# EAGLE board stm32 (EAGLE 7.7.0)
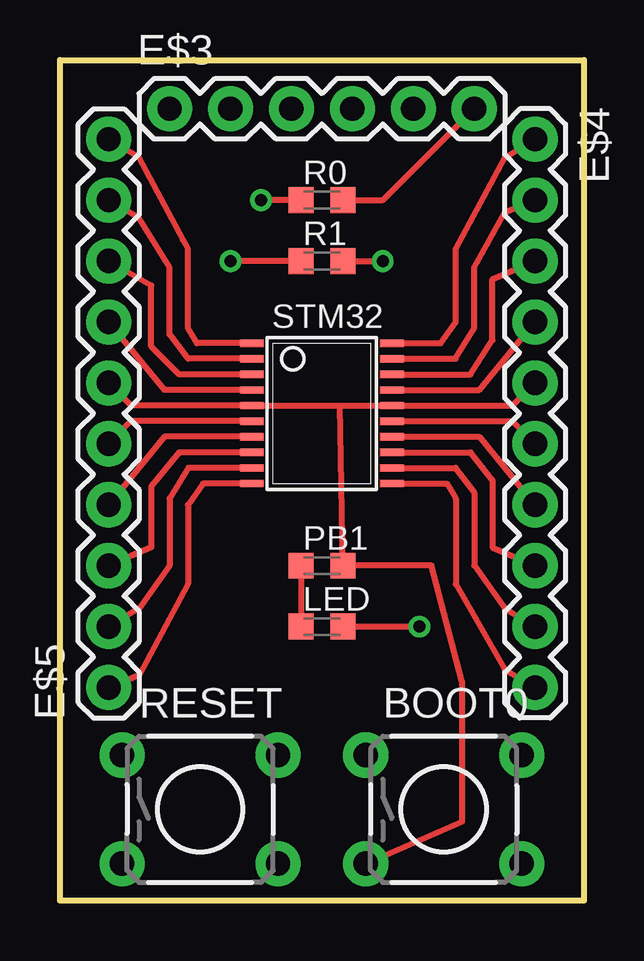
[diagram p0: board, top side]
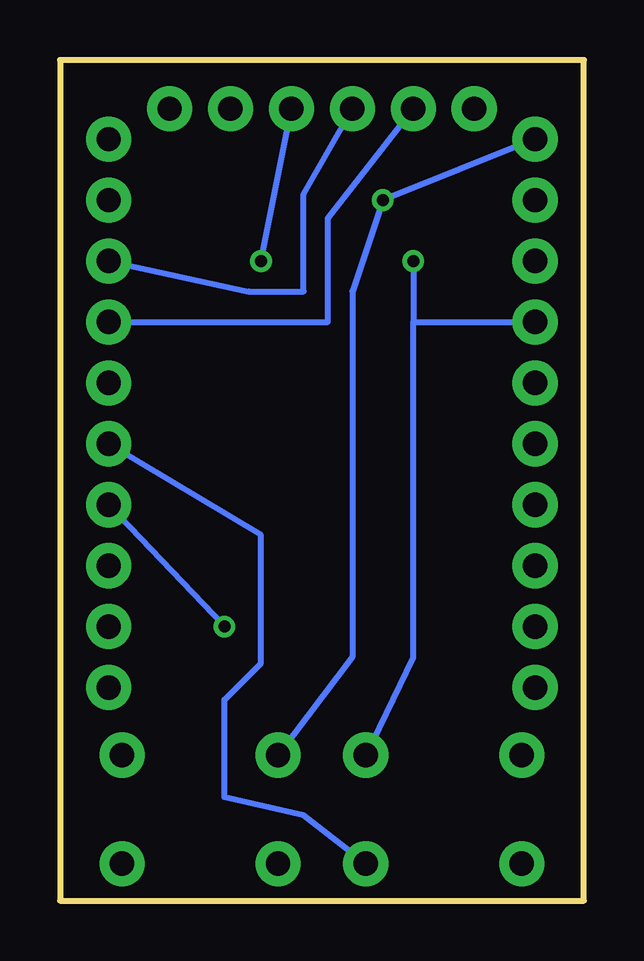
[diagram p1: board, bottom side, seen from below]

Size 21.84 x 35.05 mm. Coordinates in mm from the lower left corner, seen from the top.
Outline: 0,35.05 21.84,35.05 21.84,0 0,0 0,35.05
Copper layers (1*16): Top 0.035mm / dielectric 1.5mm / Bottom 0.035mm
Design rules "default": minimum track width 10mil, minimum drill 24mil, track to track 8mil, track to pad 8mil, pad to pad 8mil, via to via 8mil, smd to smd 8mil, copper to edge 40mil, drill to drill 8mil, minimum pad ring 10mil, minimum via ring 8mil, stop-mask expansion 4mil, vias tented up to drill 0mil, thermal gap 10mil

## Footprints (pad centres in the part's own frame; a part is rotated, then mirrored left to right if it is on the bottom)
TACTILE-PTH = drill 1.016 pad 1.88: 1 -3.251,2.261; 2 3.251,2.261; 3 -3.251,-2.261; 4 3.251,-2.261
1X06 = drill 1.016 pad 1.88: 1 0,0; 2 2.54,0; 3 5.08,0; 4 7.62,0; 5 10.16,0; 6 12.7,0
1X10 = drill 1.016 pad 1.88: 1 0,0; 2 2.54,0; 3 5.08,0; 4 7.62,0; 5 10.16,0; 6 12.7,0; 7 15.24,0; 8 17.78,0; 9 20.32,0; 10 22.86,0
C0603K = smd 1.05 x 1.08: 1 -0.875,0; 2 0.875,0
TSSOP20 = smd 0.305 x 0.991: 1 -2.925,-2.918; 2 -2.275,-2.918; 3 -1.625,-2.918; 4 -0.975,-2.918; 5 -0.325,-2.918; 6 0.325,-2.918; 7 0.975,-2.918; 8 1.625,-2.918; 9 2.275,-2.918; 10 2.925,-2.918; 11 2.925,2.918; 12 2.275,2.918; 13 1.625,2.918; 14 0.975,2.918; 15 0.325,2.918; 16 -0.325,2.918; 17 -0.975,2.918; 18 -1.625,2.918; 19 -2.275,2.918; 20 -2.925,2.918

## Placement (x,y rotation side)
BOOT0  [TACTILE-PTH]  16,3.81 0 top
E$3  [1X06]  4.57,33.02 0 top
E$4  [1X10]  19.81,31.75 270 top
E$5  [1X10]  2.03,8.89 90 top
LED  [C0603K]  10.92,11.43 0 top
PB1  [C0603K]  10.92,13.97 0 top
R0  [C0603K]  10.92,29.21 0 top
R1  [C0603K]  10.92,26.67 0 top
RESET  [TACTILE-PTH]  5.84,3.81 0 top
STM32  [TSSOP20]  10.92,20.32 270 top

## Library data of the parts
BOOT0 RESET = SparkFun-Electromechanical
E$3-E$5 = SparkFun-Connectors
LED PB1 R0 R1 STM32 = ref-packages

## Nets
BOOT0: BOOT0.1 E$5.10 R0.1 STM32.1
GND: E$4.6 RESET.4 STM32.15
NRESET: E$5.7 R1.1 RESET.2 STM32.4
PA0: E$5.5 STM32.6
PA1: E$5.4 STM32.7
PA2: E$5.3 STM32.8
PA3: E$5.2 STM32.9
PA4: E$5.1 STM32.10
PA5: E$4.10 STM32.11
PA6: E$4.9 STM32.12
PA7: E$4.8 STM32.13
PB1: E$4.7 LED.2 STM32.14
PF0: E$5.9 STM32.2
PF1: E$5.8 STM32.3
RX: E$3.3 E$4.3 STM32.18
S$3: LED.1 PB1.1
SWCLK: E$4.1 STM32.20
SWDIO: E$4.2 STM32.19
TX: E$3.2 E$4.4 STM32.17
VCC: BOOT0.3 E$4.5 E$5.6 PB1.2 STM32.5 STM32.16
XGND: E$3.6 R0.2
XVCC: E$3.4 R1.2

## Tracks (layer width: path | path; a pad name or v marks a point on that pad's centre or on a via)
BOOT0  (via drill 0.5 pad 0.25)
  Top 0.254: R0.1 v8.38,29.21 | E$5.10 3.3,30.99 5.13,27.56 5.33,27.18 5.33,23.88 5.71,23.24 STM32.1
  Bottom 0.254: BOOT0.1 9.65,10.16 9.65,25.4 v8.38,29.21 E$5.10
GND
  Top 0.254: E$4.6 18.87,19.99 STM32.15
  Bottom 0.254: RESET.4 11.68,3.56 14.99,4.32 14.99,8.38 13.46,9.91 13.46,15.24 E$4.6
NRESET  (via drill 0.5 pad 0.25)
  Top 0.254: STM32.4 4.36,21.29 E$5.7 | R1.1 v7.11,26.67
  Bottom 0.254: v7.11,26.67 7.11,24.13 | 7.11,24.13 E$5.7 | RESET.2 7.11,10.16 7.11,24.13
PA0
  Top 0.254: STM32.6 2.98,19.99 E$5.5
PA1
  Top 0.254: STM32.7 4.36,19.34 E$5.4
PA2
  Top 0.254: STM32.8 4.98,18.7 3.81,17.27 3.81,14.73 E$5.3
PA3
  Top 0.254: STM32.9 5.35,18.04 4.57,16.76 4.57,13.97 3.3,12.19 E$5.2
PA4
  Top 0.254: STM32.10 5.97,17.39 5.33,16.51 5.33,13.21 3.3,9.4 E$5.1
PA5
  Top 0.254: STM32.11 16.13,17.39 16.51,16.76 16.51,13.21 18.54,9.65 E$4.10
PA6
  Top 0.254: STM32.12 16.5,18.04 17.27,17.02 17.27,13.97 18.54,12.19 E$4.9
PA7
  Top 0.254: STM32.13 17.12,18.7 18.03,17.53 18.03,14.73 E$4.8
PB1  (via drill 0.5 pad 0.25)
  Top 0.254: STM32.14 17.48,19.34 E$4.7 | LED.2 v14.99,11.43
  Bottom 0.254: v14.99,11.43 E$4.7
PF0
  Top 0.254: STM32.2 5.35,22.59 4.57,23.62 4.57,26.42 3.3,28.45 E$5.9
PF1
  Top 0.254: STM32.3 4.98,21.95 3.81,23.11 3.81,25.65 E$5.8
RX
  Top 0.254: STM32.18 17.12,21.95 18.03,23.37 18.03,25.91 E$4.3
  Bottom 0.254: E$4.3 13.97,25.4 11.68,25.4 11.68,29.46 E$3.3
S$3
  Top 0.254: PB1.1 LED.1
SWCLK
  Top 0.254: STM32.20 15.88,23.24 16.51,24.13 16.51,27.18 18.54,30.99 E$4.1
SWDIO
  Top 0.254: STM32.19 16.5,22.59 17.27,23.88 17.27,26.42 18.54,28.7 E$4.2
TX
  Top 0.254: STM32.17 17.48,21.29 E$4.4
  Bottom 0.254: E$4.4 10.67,24.13 10.67,28.45 E$3.2
VCC
  Top 0.254: E$4.5 18.87,20.64 STM32.16 11.68,20.64 | E$5.6 2.98,20.64 STM32.5 11.68,20.64 | 11.68,20.64 PB1.2 15.49,13.97 16.76,9.14 16.76,3.3 BOOT0.3
XGND
  Top 0.254: R0.2 13.46,29.21 E$3.6
XVCC  (via drill 0.5 pad 0.25)
  Top 0.254: R1.2 v13.46,26.67
  Bottom 0.254: v13.46,26.67 E$3.4